# Altium PCB ControlsBoard.PcbDoc
Units mm, origin at the board's own origin, x right, y up, seen from the top; angles counter-clockwise.
Board outline 252.5 x 115 mm, 2 copper layers (Top Layer, Bottom Layer); 145 components, 65 nets, 227 pads, 0 vias.
Unrouted connection lines stored in the file: 84.
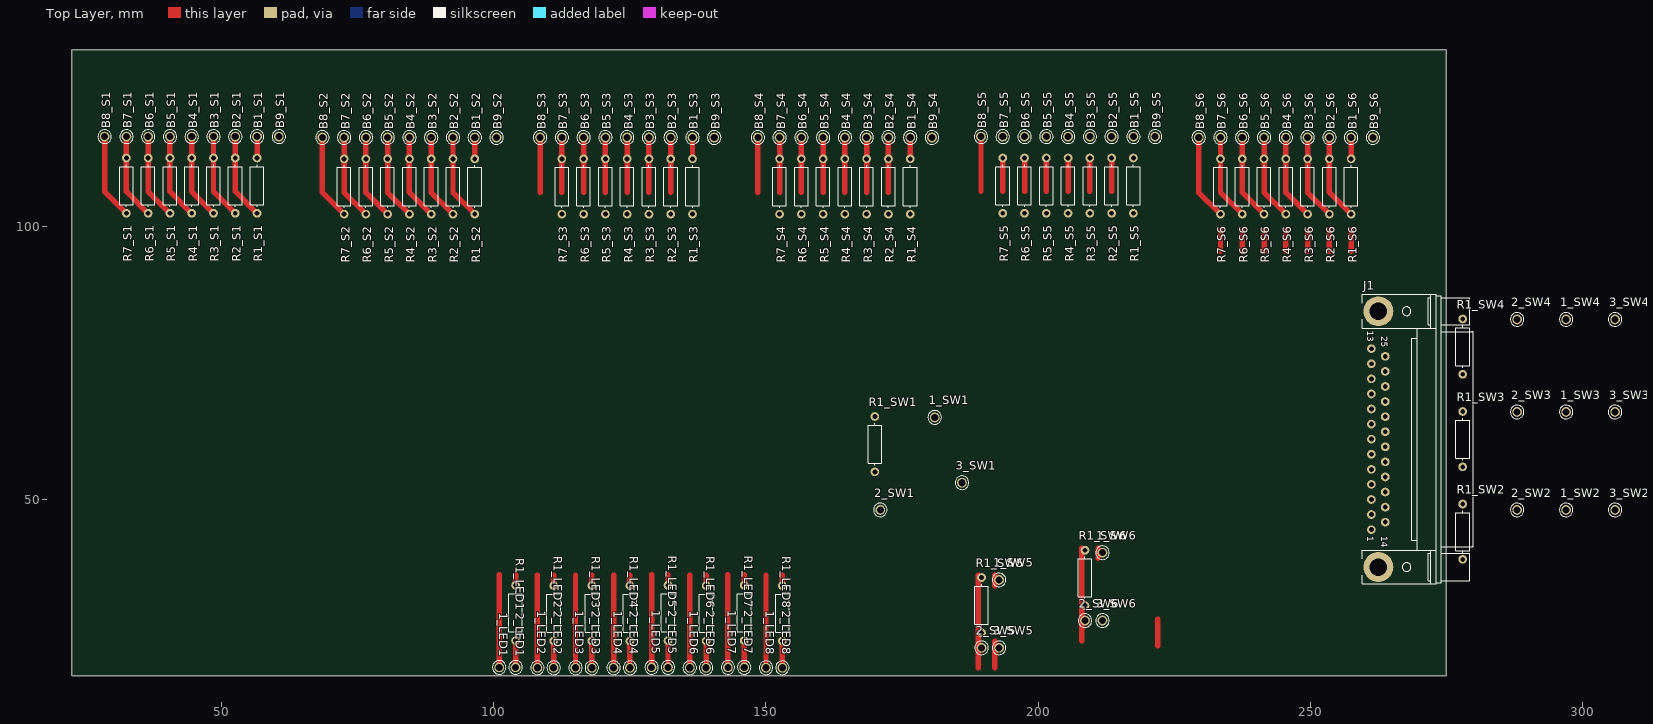
[diagram p0: Top Layer view]
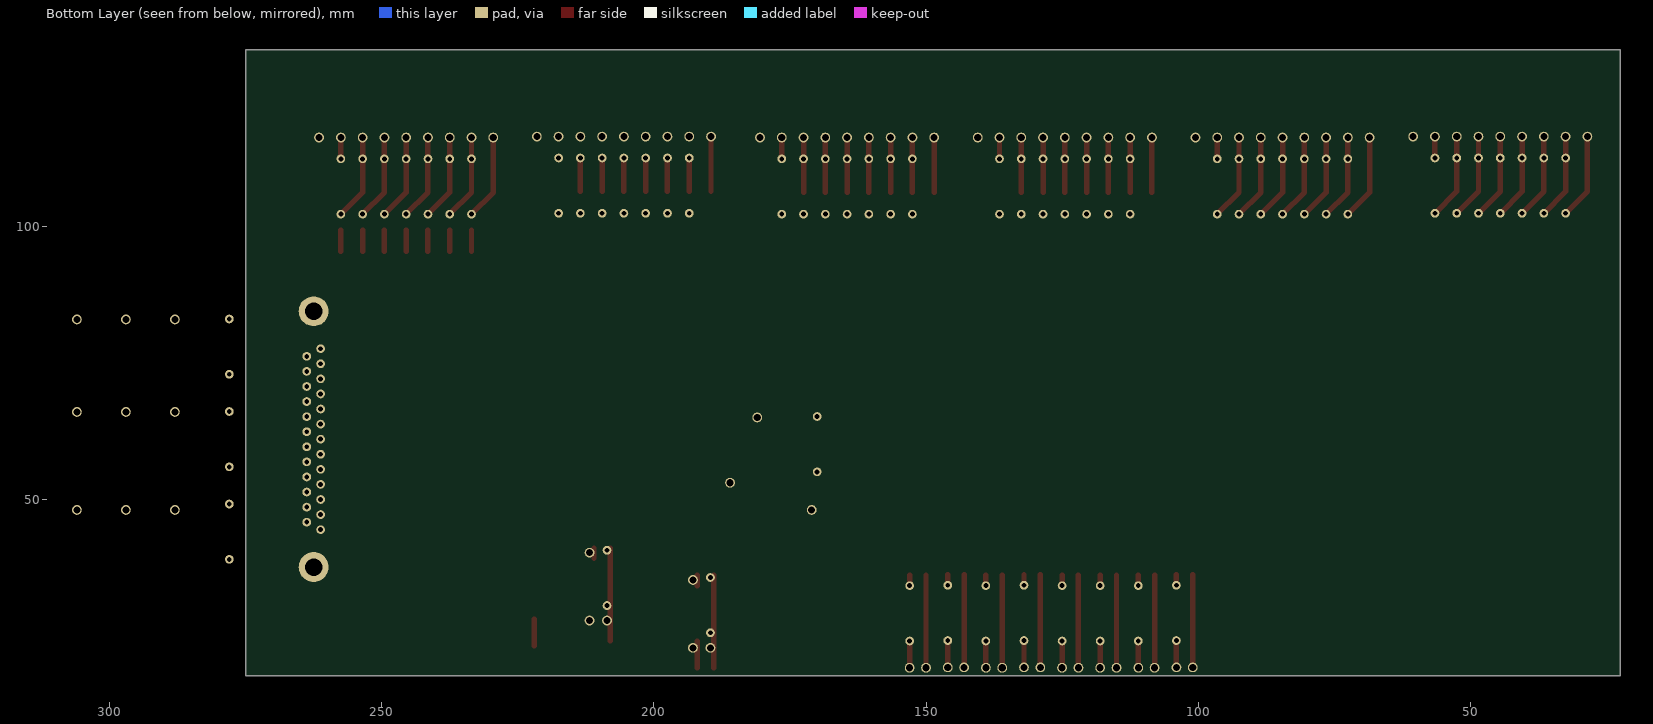
[diagram p1: Bottom Layer view, seen from below]

## Layer stack, top to bottom
Top Solder: solder mask 0.0102, Solder Resist, Dk 3.5
Top Layer: signal copper 0.0356
Dielectric 1: dielectric 0.32, FR-4, Dk 4.8
Bottom Layer: signal copper 0.0356
Bottom Solder: solder mask 0.0102, Solder Resist, Dk 3.5

## Board outline
22.5,130 22.5,132.5 275,132.5 275,17.5 22.5,17.5

## Design rules (kind name [scope] priority, off if disabled: settings)
Clearance [All] p1: gap=0.254
PolygonConnect [All] p1: connectstyle=Relief reliefconductorwidth=0.254 reliefentries=4 polygonreliefangle="90 Angle" airgapwidth=0.254
RoomDefinition SW4 [InComponentClass('SW4')] p1: confinementstyle=ConfineIn formatcopy=TRUE lockcomponents=FALSE outline 276,71 313,71 313,88 276,88
RoomDefinition SW3 [InComponentClass('SW3')] p2: confinementstyle=ConfineIn formatcopy=TRUE lockcomponents=FALSE outline 276,54 313,54 313,71 276,71
RoomDefinition SW2 [InComponentClass('SW2')] p3: confinementstyle=ConfineIn formatcopy=TRUE lockcomponents=FALSE outline 276,37 313,37 313,53 276,53
RoomDefinition LED1 [InComponentClass('LED1')] p4: confinementstyle=ConfineIn formatcopy=TRUE lockcomponents=FALSE outline 107,37.08 100,37.08 100,17.08 107,17.08
RoomDefinition LED2 [InComponentClass('LED2')] p5: confinementstyle=ConfineIn formatcopy=TRUE lockcomponents=FALSE outline 114,37 107,37 107,17 114,17
RoomDefinition LED3 [InComponentClass('LED3')] p6: confinementstyle=ConfineIn formatcopy=TRUE lockcomponents=FALSE outline 121,37 114,37 114,17 121,17
RoomDefinition LED4 [InComponentClass('LED4')] p7: confinementstyle=ConfineIn formatcopy=TRUE lockcomponents=FALSE outline 128,37 121,37 121,17 128,17
RoomDefinition LED5 [InComponentClass('LED5')] p8: confinementstyle=ConfineIn formatcopy=TRUE lockcomponents=FALSE outline 135,37.08 128,37.08 128,17.08 135,17.08
RoomDefinition LED6 [InComponentClass('LED6')] p9: confinementstyle=ConfineIn formatcopy=TRUE lockcomponents=FALSE outline 142,37 135,37 135,17 142,17
RoomDefinition SW6 [InComponentClass('SW6')] p10: confinementstyle=ConfineIn formatcopy=TRUE lockcomponents=FALSE outline 214,42 207,42 207,22 214,22
RoomDefinition SW5 [InComponentClass('SW5')] p11: confinementstyle=ConfineIn formatcopy=TRUE lockcomponents=FALSE outline 195,37 188,37 188,17 195,17
RoomDefinition SW1 [InComponentClass('SW1')] p12: confinementstyle=ConfineIn formatcopy=TRUE lockcomponents=FALSE outline 175.396,66.57 168.396,66.57 168.396,46.57 175.396,46.57
RoomDefinition LED8 [InComponentClass('LED8')] p13: confinementstyle=ConfineIn formatcopy=TRUE lockcomponents=FALSE outline 156,37 149,37 149,17 156,17
RoomDefinition LED7 [InComponentClass('LED7')] p14: confinementstyle=ConfineIn formatcopy=TRUE lockcomponents=FALSE outline 149,37.08 142,37.08 142,17.08 149,17.08
RoomDefinition S6 [InComponentClass('S6')] p15: confinementstyle=ConfineIn formatcopy=TRUE lockcomponents=FALSE outline 226.5,92.42 263.5,92.42 263.5,125.42 226.5,125.42
RoomDefinition S5 [InComponentClass('S5')] p16: confinementstyle=ConfineIn formatcopy=TRUE lockcomponents=FALSE outline 186.5,92.58 223.5,92.58 223.5,125.58 186.5,125.58
RoomDefinition S4 [InComponentClass('S4')] p17: confinementstyle=ConfineIn formatcopy=TRUE lockcomponents=FALSE outline 145.5,92.42 182.5,92.42 182.5,125.42 145.5,125.42
RoomDefinition S3 [InComponentClass('S3')] p18: confinementstyle=ConfineIn formatcopy=TRUE lockcomponents=FALSE outline 105.5,92.42 142.5,92.42 142.5,125.42 105.5,125.42
RoomDefinition S2 [InComponentClass('S2')] p19: confinementstyle=ConfineIn formatcopy=TRUE lockcomponents=FALSE outline 65.5,92.42 102.5,92.42 102.5,125.42 65.5,125.42
RoomDefinition S1 [InComponentClass('S1')] p20: confinementstyle=ConfineIn formatcopy=TRUE lockcomponents=FALSE outline 25.5,92.58 62.5,92.58 62.5,125.58 25.5,125.58
RoomDefinition ControlsBoard [InComponentClass('ControlsBoard')] p21: confinementstyle=ConfineIn formatcopy=TRUE lockcomponents=FALSE outline 280.5,88 258.5,88 258.5,31 280.5,31
RoutingVias [All] p1: holewidth=0.711 width=1.27 viastyle="Through Hole" minholewidth=0.711 minwidth=1.27 maxholewidth=0.711 maxwidth=1.27
SolderMaskExpansion [All] p1: expansion=0.102
Width [All] p1: maxlimit=2 minlimit=0.5 preferedwidth=1
29 further rules are at their usual default settings.

## Classes and differential pairs
channel class BypassUnit: SW1 SW2 SW3 SW4 SW5 SW6
component class S1: B1_S1 B2_S1 B3_S1 B4_S1 B5_S1 B6_S1 B7_S1 B8_S1 B9_S1 R1_S1 R2_S1 R3_S1 R4_S1 R5_S1 R6_S1 R7_S1
component class ControlsBoard: J1
net class SEL_BUS[1..6]: SEL_BUS1 SEL_BUS2 SEL_BUS3 SEL_BUS4 SEL_BUS5 SEL_BUS6
component class S2: B1_S2 B2_S2 B3_S2 B4_S2 B5_S2 B6_S2 B7_S2 B8_S2 B9_S2 R1_S2 R2_S2 R3_S2 R4_S2 R5_S2 R6_S2 R7_S2
component class S3: B1_S3 B2_S3 B3_S3 B4_S3 B5_S3 B6_S3 B7_S3 B8_S3 B9_S3 R1_S3 R2_S3 R3_S3 R4_S3 R5_S3 R6_S3 R7_S3
component class S4: B1_S4 B2_S4 B3_S4 B4_S4 B5_S4 B6_S4 B7_S4 B8_S4 B9_S4 R1_S4 R2_S4 R3_S4 R4_S4 R5_S4 R6_S4 R7_S4
component class S5: B1_S5 B2_S5 B3_S5 B4_S5 B5_S5 B6_S5 B7_S5 B8_S5 B9_S5 R1_S5 R2_S5 R3_S5 R4_S5 R5_S5 R6_S5 R7_S5
component class S6: B1_S6 B2_S6 B3_S6 B4_S6 B5_S6 B6_S6 B7_S6 B8_S6 B9_S6 R1_S6 R2_S6 R3_S6 R4_S6 R5_S6 R6_S6 R7_S6
channel class ResDivider: S1 S2 S3 S4 S5 S6
component class LED1: 1_LED1 2_LED1 R1_LED1
component class LED2: 1_LED2 2_LED2 R1_LED2
component class LED3: 1_LED3 2_LED3 R1_LED3
component class LED4: 1_LED4 2_LED4 R1_LED4
component class LED5: 1_LED5 2_LED5 R1_LED5
component class LED6: 1_LED6 2_LED6 R1_LED6
component class LED7: 1_LED7 1_LED13 2_LED7 2_LED13 R1_LED7 R1_LED13
component class LED8: 1_LED8 1_LED14 2_LED8 2_LED14 R1_LED8 R1_LED14
component class SW6: 1_SW6 2_SW6 3_SW6 R1_SW6
component class SW5: 1_SW5 2_SW5 3_SW5 R1_SW5
component class SW4: 1_SW4 2_SW4 3_SW4 R1_SW4
component class SW3: 1_SW3 2_SW3 3_SW3 R1_SW3
component class SW2: 1_SW2 2_SW2 3_SW2 R1_SW2
component class SW1: 1_SW1 2_SW1 3_SW1 R1_SW1
net class BP_BUS[1..8]: BP_BUS1 BP_BUS2 BP_BUS3 BP_BUS4 BP_BUS5 BP_BUS6 BP_BUS7 BP_BUS8
net class LED_BUS[1..8]: LED_BUS1 LED_BUS2 LED_BUS3 LED_BUS4 LED_BUS5 LED_BUS6 LED_BUS7 LED_BUS8
channel class LedUnit: LED1 LED2 LED3 LED4 LED5 LED6 LED7 LED8 SW9 SW10 SW11 SW12 SW13 SW14

## Components (designator, comment, footprint, x,y, rotation, side; value= is the part's Value field where it differs from the comment)
1_LED1 "Plated Hole" c180h130 101,19.08 r270 top (schematic designator 1)
1_LED2 "Plated Hole" c180h130 108,19 r270 top (schematic designator 1)
1_LED3 "Plated Hole" c180h130 115,19 r270 top (schematic designator 1)
1_LED4 "Plated Hole" c180h130 122,19 r270 top (schematic designator 1)
1_LED5 "Plated Hole" c180h130 129,19.08 r270 top (schematic designator 1)
1_LED6 "Plated Hole" c180h130 136,19 r270 top (schematic designator 1)
1_LED7 "Plated Hole" c180h130 143,19.08 r270 top (schematic designator 1)
1_LED8 "Plated Hole" c180h130 150,19 r270 top (schematic designator 1)
1_SW1 "Plated Hole" c180h130 181,65 r90 top (schematic designator 1)
1_SW2 "Plated Hole" c180h130 297,48 r90 top (schematic designator 1)
1_SW3 "Plated Hole" c180h130 297,66 r90 top (schematic designator 1)
1_SW4 "Plated Hole" c180h130 297,83 r90 top (schematic designator 1)
1_SW5 "Plated Hole" c180h130 192.812,35.142 r90 top (schematic designator 1)
1_SW6 "Plated Hole" c180h130 211.812,40.142 r90 top (schematic designator 1)
2_LED1 "Plated Hole" c180h130 104,19.08 r270 top (schematic designator 2)
2_LED2 "Plated Hole" c180h130 111,19 r270 top (schematic designator 2)
2_LED3 "Plated Hole" c180h130 118,19 r270 top (schematic designator 2)
2_LED4 "Plated Hole" c180h130 125,19 r270 top (schematic designator 2)
2_LED5 "Plated Hole" c180h130 132,19.08 r270 top (schematic designator 2)
2_LED6 "Plated Hole" c180h130 139,19 r270 top (schematic designator 2)
2_LED7 "Plated Hole" c180h130 146,19.08 r270 top (schematic designator 2)
2_LED8 "Plated Hole" c180h130 153,19 r270 top (schematic designator 2)
2_SW1 "Plated Hole" c180h130 171,48 r90 top (schematic designator 2)
2_SW2 "Plated Hole" c180h130 288,48 r90 top (schematic designator 2)
2_SW3 "Plated Hole" c180h130 288,66 r90 top (schematic designator 2)
2_SW4 "Plated Hole" c180h130 288,83 r90 top (schematic designator 2)
2_SW5 "Plated Hole" c180h130 189.604,22.671 r90 top (schematic designator 2)
2_SW6 "Plated Hole" c180h130 208.604,27.671 r90 top (schematic designator 2)
3_SW1 "Plated Hole" c180h130 186,53 r90 top (schematic designator 3)
3_SW2 "Plated Hole" c180h130 306,48 r90 top (schematic designator 3)
3_SW3 "Plated Hole" c180h130 306,66 r90 top (schematic designator 3)
3_SW4 "Plated Hole" c180h130 306,83 r90 top (schematic designator 3)
3_SW5 "Plated Hole" c180h130 192.812,22.671 r90 top (schematic designator 3)
3_SW6 "Plated Hole" c180h130 211.812,27.671 r90 top (schematic designator 3)
B1_S1 "Plated Hole" c180h130 56.5,116.58 r90 top (schematic designator B1)
B1_S2 "Plated Hole" c180h130 96.5,116.42 r90 top (schematic designator B1)
B1_S3 "Plated Hole" c180h130 136.5,116.42 r90 top (schematic designator B1)
B1_S4 "Plated Hole" c180h130 176.5,116.42 r90 top (schematic designator B1)
B1_S5 "Plated Hole" c180h130 217.5,116.58 r90 top (schematic designator B1)
B1_S6 "Plated Hole" c180h130 257.5,116.42 r90 top (schematic designator B1)
B2_S1 "Plated Hole" c180h130 52.5,116.58 r90 top (schematic designator B2)
B2_S2 "Plated Hole" c180h130 92.5,116.42 r90 top (schematic designator B2)
B2_S3 "Plated Hole" c180h130 132.5,116.42 r90 top (schematic designator B2)
B2_S4 "Plated Hole" c180h130 172.5,116.42 r90 top (schematic designator B2)
B2_S5 "Plated Hole" c180h130 213.5,116.58 r90 top (schematic designator B2)
B2_S6 "Plated Hole" c180h130 253.5,116.42 r90 top (schematic designator B2)
B3_S1 "Plated Hole" c180h130 48.5,116.58 r90 top (schematic designator B3)
B3_S2 "Plated Hole" c180h130 88.5,116.42 r90 top (schematic designator B3)
B3_S3 "Plated Hole" c180h130 128.5,116.42 r90 top (schematic designator B3)
B3_S4 "Plated Hole" c180h130 168.5,116.42 r90 top (schematic designator B3)
B3_S5 "Plated Hole" c180h130 209.5,116.58 r90 top (schematic designator B3)
B3_S6 "Plated Hole" c180h130 249.5,116.42 r90 top (schematic designator B3)
B4_S1 "Plated Hole" c180h130 44.5,116.58 r90 top (schematic designator B4)
B4_S2 "Plated Hole" c180h130 84.5,116.42 r90 top (schematic designator B4)
B4_S3 "Plated Hole" c180h130 124.5,116.42 r90 top (schematic designator B4)
B4_S4 "Plated Hole" c180h130 164.5,116.42 r90 top (schematic designator B4)
B4_S5 "Plated Hole" c180h130 205.5,116.58 r90 top (schematic designator B4)
B4_S6 "Plated Hole" c180h130 245.5,116.42 r90 top (schematic designator B4)
B5_S1 "Plated Hole" c180h130 40.5,116.58 r90 top (schematic designator B5)
B5_S2 "Plated Hole" c180h130 80.5,116.42 r90 top (schematic designator B5)
B5_S3 "Plated Hole" c180h130 120.5,116.42 r90 top (schematic designator B5)
B5_S4 "Plated Hole" c180h130 160.5,116.42 r90 top (schematic designator B5)
B5_S5 "Plated Hole" c180h130 201.5,116.58 r90 top (schematic designator B5)
B5_S6 "Plated Hole" c180h130 241.5,116.42 r90 top (schematic designator B5)
B6_S1 "Plated Hole" c180h130 36.5,116.58 r90 top (schematic designator B6)
B6_S2 "Plated Hole" c180h130 76.5,116.42 r90 top (schematic designator B6)
B6_S3 "Plated Hole" c180h130 116.5,116.42 r90 top (schematic designator B6)
B6_S4 "Plated Hole" c180h130 156.5,116.42 r90 top (schematic designator B6)
B6_S5 "Plated Hole" c180h130 197.5,116.58 r90 top (schematic designator B6)
B6_S6 "Plated Hole" c180h130 237.5,116.42 r90 top (schematic designator B6)
B7_S1 "Plated Hole" c180h130 32.5,116.58 r90 top (schematic designator B7)
B7_S2 "Plated Hole" c180h130 72.5,116.42 r90 top (schematic designator B7)
B7_S3 "Plated Hole" c180h130 112.5,116.42 r90 top (schematic designator B7)
B7_S4 "Plated Hole" c180h130 152.5,116.42 r90 top (schematic designator B7)
B7_S5 "Plated Hole" c180h130 193.5,116.58 r90 top (schematic designator B7)
B7_S6 "Plated Hole" c180h130 233.5,116.42 r90 top (schematic designator B7)
B8_S1 "Plated Hole" c180h130 28.5,116.58 r90 top (schematic designator B8)
B8_S2 "Plated Hole" c180h130 68.5,116.42 r90 top (schematic designator B8)
B8_S3 "Plated Hole" c180h130 108.5,116.42 r90 top (schematic designator B8)
B8_S4 "Plated Hole" c180h130 148.5,116.42 r90 top (schematic designator B8)
B8_S5 "Plated Hole" c180h130 189.5,116.58 r90 top (schematic designator B8)
B8_S6 "Plated Hole" c180h130 229.5,116.42 r90 top (schematic designator B8)
B9_S1 "Plated Hole" c180h130 60.5,116.58 r90 top (schematic designator B9)
B9_S2 "Plated Hole" c180h130 100.5,116.42 r90 top (schematic designator B9)
B9_S3 "Plated Hole" c180h130 140.5,116.42 r90 top (schematic designator B9)
B9_S4 "Plated Hole" c180h130 180.5,116.42 r90 top (schematic designator B9)
B9_S5 "Plated Hole" c180h130 221.5,116.58 r90 top (schematic designator B9)
B9_S6 "Plated Hole" c180h130 261.5,116.42 r90 top (schematic designator B9)
J1 "D-Sub" AMPHENOL_L717DFB25P1ATN 262.5,61 r270 top
R1_LED1 "510" RES_ARCOL_RCC025 104,29.08 r270 top (schematic designator R1)
R1_LED2 "510" RES_ARCOL_RCC025 111,29 r270 top (schematic designator R1)
R1_LED3 "510" RES_ARCOL_RCC025 118,29 r270 top (schematic designator R1)
R1_LED4 "510" RES_ARCOL_RCC025 125,29 r270 top (schematic designator R1)
R1_LED5 "510" RES_ARCOL_RCC025 132,29.08 r270 top (schematic designator R1)
R1_LED6 "510" RES_ARCOL_RCC025 139,29 r270 top (schematic designator R1)
R1_LED7 "510" RES_ARCOL_RCC025 146,29.08 r270 top (schematic designator R1)
R1_LED8 "510" RES_ARCOL_RCC025 153,29 r270 top (schematic designator R1)
R1_S1 "10K" RES_ARCOL_RCC025 56.5,107.58 r90 top (schematic designator R1)
R1_S2 "10K" RES_ARCOL_RCC025 96.5,107.42 r90 top (schematic designator R1)
R1_S3 "10K" RES_ARCOL_RCC025 136.5,107.42 r90 top (schematic designator R1)
R1_S4 "10K" RES_ARCOL_RCC025 176.5,107.42 r90 top (schematic designator R1)
R1_S5 "10K" RES_ARCOL_RCC025 217.5,107.58 r90 top (schematic designator R1)
R1_S6 "10K" RES_ARCOL_RCC025 257.5,107.42 r90 top (schematic designator R1)
R1_SW1 "510" RES_ARCOL_RCC025 170,60.08 r90 top (schematic designator R1)
R1_SW2 "510" RES_ARCOL_RCC025 278,44 r90 top (schematic designator R1)
R1_SW3 "510" RES_ARCOL_RCC025 278,61 r90 top (schematic designator R1)
R1_SW4 "510" RES_ARCOL_RCC025 278,78 r90 top (schematic designator R1)
R1_SW5 "510" RES_ARCOL_RCC025 189.604,30.51 r90 top (schematic designator R1)
R1_SW6 "510" RES_ARCOL_RCC025 208.604,35.51 r90 top (schematic designator R1)
R2_S1 "10K" RES_ARCOL_RCC025 52.5,107.58 r90 top (schematic designator R2)
R2_S2 "10K" RES_ARCOL_RCC025 92.5,107.42 r90 top (schematic designator R2)
R2_S3 "10K" RES_ARCOL_RCC025 132.5,107.42 r90 top (schematic designator R2)
R2_S4 "10K" RES_ARCOL_RCC025 172.5,107.42 r90 top (schematic designator R2)
R2_S5 "10K" RES_ARCOL_RCC025 213.5,107.58 r90 top (schematic designator R2)
R2_S6 "10K" RES_ARCOL_RCC025 253.5,107.42 r90 top (schematic designator R2)
R3_S1 "10K" RES_ARCOL_RCC025 48.5,107.58 r90 top (schematic designator R3)
R3_S2 "10K" RES_ARCOL_RCC025 88.5,107.42 r90 top (schematic designator R3)
R3_S3 "10K" RES_ARCOL_RCC025 128.5,107.42 r90 top (schematic designator R3)
R3_S4 "10K" RES_ARCOL_RCC025 168.5,107.42 r90 top (schematic designator R3)
R3_S5 "10K" RES_ARCOL_RCC025 209.5,107.58 r90 top (schematic designator R3)
R3_S6 "10K" RES_ARCOL_RCC025 249.5,107.42 r90 top (schematic designator R3)
R4_S1 "10K" RES_ARCOL_RCC025 44.5,107.58 r90 top (schematic designator R4)
R4_S2 "10K" RES_ARCOL_RCC025 84.5,107.42 r90 top (schematic designator R4)
R4_S3 "10K" RES_ARCOL_RCC025 124.5,107.42 r90 top (schematic designator R4)
R4_S4 "10K" RES_ARCOL_RCC025 164.5,107.42 r90 top (schematic designator R4)
R4_S5 "10K" RES_ARCOL_RCC025 205.5,107.58 r90 top (schematic designator R4)
R4_S6 "10K" RES_ARCOL_RCC025 245.5,107.42 r90 top (schematic designator R4)
R5_S1 "10K" RES_ARCOL_RCC025 40.5,107.58 r90 top (schematic designator R5)
R5_S2 "10K" RES_ARCOL_RCC025 80.5,107.42 r90 top (schematic designator R5)
R5_S3 "10K" RES_ARCOL_RCC025 120.5,107.42 r90 top (schematic designator R5)
R5_S4 "10K" RES_ARCOL_RCC025 160.5,107.42 r90 top (schematic designator R5)
R5_S5 "10K" RES_ARCOL_RCC025 201.5,107.58 r90 top (schematic designator R5)
R5_S6 "10K" RES_ARCOL_RCC025 241.5,107.42 r90 top (schematic designator R5)
R6_S1 "10K" RES_ARCOL_RCC025 36.5,107.58 r90 top (schematic designator R6)
R6_S2 "10K" RES_ARCOL_RCC025 76.5,107.42 r90 top (schematic designator R6)
R6_S3 "10K" RES_ARCOL_RCC025 116.5,107.42 r90 top (schematic designator R6)
R6_S4 "10K" RES_ARCOL_RCC025 156.5,107.42 r90 top (schematic designator R6)
R6_S5 "10K" RES_ARCOL_RCC025 197.5,107.58 r90 top (schematic designator R6)
R6_S6 "10K" RES_ARCOL_RCC025 237.5,107.42 r90 top (schematic designator R6)
R7_S1 "10K" RES_ARCOL_RCC025 32.5,107.58 r90 top (schematic designator R7)
R7_S2 "10K" RES_ARCOL_RCC025 72.5,107.42 r90 top (schematic designator R7)
R7_S3 "10K" RES_ARCOL_RCC025 112.5,107.42 r90 top (schematic designator R7)
R7_S4 "10K" RES_ARCOL_RCC025 152.5,107.42 r90 top (schematic designator R7)
R7_S5 "10K" RES_ARCOL_RCC025 193.5,107.58 r90 top (schematic designator R7)
R7_S6 "10K" RES_ARCOL_RCC025 233.5,107.42 r90 top (schematic designator R7)

## Footprints (in the part's own frame and the unit in brackets; to place one, negate y for a bottom-side part, rotate by r counter-clockwise, add the part's x,y. Pads: shape width x height; smd on the part's side, far side on the other; paste and mask are expansions set on the pad)
AMPHENOL_L717DFB25P1ATN [mm] "Right Angled D-Sub 25 Male Contacts with Metal Bracket and Front Female Screwlock (UNC4-40)"
  round 1.6 hole 0.9: 1(16.62,-1.27) 2(13.85,-1.27) 3(11.08,-1.27) 4(8.31,-1.27) 5(5.54,-1.27) 6(2.77,-1.27) 7(0,-1.27) 8(-2.77,-1.27) 9(-5.54,-1.27) 10(-8.31,-1.27) 11(-11.08,-1.27) 12(-13.85,-1.27) 13(-16.62,-1.27) 14(15.25,1.27) 15(12.48,1.27) 16(9.71,1.27) 17(6.94,1.27) 18(4.17,1.27) 19(1.4,1.27) 20(-1.37,1.27) 21(-4.14,1.27) 22(-6.91,1.27) 23(-9.68,1.27) 24(-12.45,1.27) 25(-15.22,1.27)
  round 5.5 hole 3.2: 26(-23.5,0) 27(23.5,0)
  silkscreen extent -26.6,-2.93 26.6,17.47, body extent -26.6,-2.93 26.6,17.47, height 13.45
c180h130 [mm] "Plated Through Hole: Hole Dia.=1.3mm Pad Dia.=1.8mm"
  round 1.8 hole 1.3: 1(0,0)
  silkscreen extent -1.25,-1.25 1.25,1.25
RES_ARCOL_RCC025 [mm] "Resistor, Axial, Pad spacing 10.16 mm - Body Lengh 6.3m X Body Diameter 2.4mm"
  round 1.6 hole 0.9: 1(-5.08,0) 2(5.08,0)
  silkscreen extent -3.88,-1.25 3.88,1.25, body extent -5.38,-1.25 5.38,1.25, height 2.5

## Part data
1_LED1 1_LED2 1_LED3 1_LED4 1_LED5 1_LED6 1_LED7 1_LED8 1_SW1 1_SW2 1_SW3 1_SW4 1_SW5 1_SW6 2_LED1 2_LED2 2_LED3 2_LED4 2_LED5 2_LED6 2_LED7 2_LED8 2_SW1 2_SW2 2_SW3 2_SW4 2_SW5 2_SW6 3_SW1 3_SW2 3_SW3 3_SW4 3_SW5 3_SW6 B1_S1 B1_S2 B1_S3 B1_S4 B1_S5 B1_S6 B2_S1 B2_S2 B2_S3 B2_S4 B2_S5 B2_S6 B3_S1 B3_S2 B3_S3 B3_S4 B3_S5 B3_S6 B4_S1 B4_S2 B4_S3 B4_S4 B4_S5 B4_S6 B5_S1 B5_S2 B5_S3 B5_S4 B5_S5 B5_S6 B6_S1 B6_S2 B6_S3 B6_S4 B6_S5 B6_S6 B7_S1 B7_S2 B7_S3 B7_S4 B7_S5 B7_S6 B8_S1 B8_S2 B8_S3 B8_S4 B8_S5 B8_S6 B9_S1 B9_S2 B9_S3 B9_S4 B9_S5 B9_S6: library part PLATED_HOLE1.3_PAD1.8, "Single Terminal Socket"
J1: library part AMPHENOL_L717DFB25P1ATN, "Connector D-sub 25 Male"
R1_LED1 R1_LED2 R1_LED3 R1_LED4 R1_LED5 R1_LED6 R1_LED7 R1_LED8 R1_S1 R1_S2 R1_S3 R1_S4 R1_S5 R1_S6 R1_SW1 R1_SW2 R1_SW3 R1_SW4 R1_SW5 R1_SW6 R2_S1 R2_S2 R2_S3 R2_S4 R2_S5 R2_S6 R3_S1 R3_S2 R3_S3 R3_S4 R3_S5 R3_S6 R4_S1 R4_S2 R4_S3 R4_S4 R4_S5 R4_S6 R5_S1 R5_S2 R5_S3 R5_S4 R5_S5 R5_S6 R6_S1 R6_S2 R6_S3 R6_S4 R6_S5 R6_S6 R7_S1 R7_S2 R7_S3 R7_S4 R7_S5 R7_S6: library part RCF_5K1_5%_0.25W_+10-6PPM_ARCOL_RCC025, "Resistor - 5%"

## Nets (pads, with @x,y where several pads share a name; then routed paths per layer and width w, separated by ;. In a path a pad name is that pad's centre, name@x,y a point inside that pad or via, vN(x,y) a via of type N, cw(c..) or ccw(c..) an arc to the next point about the centre after c; other vN are vias at no path point)
BP_BUS1: 1_SW1.1 | length 17
  Top Layer w1: 208,24 208,41
BP_BUS2: 1_SW2.1 | length 17
  Top Layer w1: 189,19 189,36
BP_BUS3: 1_SW3.1
BP_BUS4: 1_SW4.1
BP_BUS5: 1_SW5.1
BP_BUS6: 1_SW6.1
GND: B8_S1.1 B8_S2.1 B8_S3.1 B8_S4.1 B8_S5.1 B8_S6.1 R1_LED1.1 R1_LED2.1 R1_LED3.1 R1_LED4.1 R1_LED5.1 R1_LED6.1 R1_LED7.1 R1_LED8.1 R1_SW1.1 R1_SW2.1 R1_SW3.1 R1_SW4.1 R1_SW5.1 R1_SW6.1 R7_S1.1 R7_S2.1 R7_S3.1 R7_S4.1 R7_S5.1 R7_S6.1 | length 96.7
  Top Layer w1: B8_S1.1 28.5,106.5 R7_S1.1 ; B8_S2.1 68.5,106.34 R7_S2.1 ; R1_LED1.1 104,36.08 ; 108.5,106.34 B8_S3.1 ; R1_LED2.1 111,36 ; R1_LED3.1 118,36 ; R1_LED4.1 125,36 ; R1_LED5.1 132,36.08 ; R1_LED6.1 139,36 ; R1_LED7.1 146,36.08 ; 148.5,106.34 B8_S4.1 ; R1_LED8.1 153,36 ; 189.5,106.5 B8_S5.1 ; 192,34.08 192,36 ; 211,39.08 211,41 ; B8_S6.1 229.5,106.34 R7_S6.1
LED_BUS: 1_LED1.1 1_LED2.1 1_LED3.1 1_LED4.1 1_LED5.1 1_LED6.1 1_LED7.1 1_LED8.1 | length 136
  Top Layer w1: 1_LED1.1 101,36.08 ; 1_LED2.1 108,36 ; 1_LED3.1 115,36 ; 1_LED4.1 122,36 ; 1_LED5.1 129,36.08 ; 1_LED6.1 136,36 ; 1_LED7.1 143,36.08 ; 1_LED8.1 150,36
Net2_LED1_1: 2_LED1.1 R1_LED1.2 | length 4.9
  Top Layer w1: 2_LED1.1 R1_LED1.2
Net2_LED2_1: 2_LED2.1 R1_LED2.2 | length 4.9
  Top Layer w1: 2_LED2.1 R1_LED2.2
Net2_LED3_1: 2_LED3.1 R1_LED3.2 | length 4.9
  Top Layer w1: 2_LED3.1 R1_LED3.2
Net2_LED4_1: 2_LED4.1 R1_LED4.2 | length 4.9
  Top Layer w1: 2_LED4.1 R1_LED4.2
Net2_LED5_1: 2_LED5.1 R1_LED5.2 | length 4.9
  Top Layer w1: 2_LED5.1 R1_LED5.2
Net2_LED6_1: 2_LED6.1 R1_LED6.2 | length 4.9
  Top Layer w1: 2_LED6.1 R1_LED6.2
Net2_LED7_1: 2_LED7.1 R1_LED7.2 | length 4.9
  Top Layer w1: 2_LED7.1 R1_LED7.2
Net2_LED8_1: 2_LED8.1 R1_LED8.2 | length 4.9
  Top Layer w1: 2_LED8.1 R1_LED8.2
Net2_SW1_1: 2_SW1.1 R1_SW1.2 | length 4.9
  Top Layer w1: 222,23 222,27.92
Net2_SW2_1: 2_SW2.1 R1_SW2.2 | length 4.9
  Top Layer w1: 192,19 192,23.92
Net2_SW3_1: 2_SW3.1 R1_SW3.2
Net2_SW4_1: 2_SW4.1 R1_SW4.2
Net2_SW5_1: 2_SW5.1 R1_SW5.2
Net2_SW6_1: 2_SW6.1 R1_SW6.2
NetB2_S1_1: B2_S1.1 R1_S1.1 R2_S1.2 | length 15.7
  Top Layer w1: B2_S1.1 R2_S1.2 52.5,106.5 R1_S1.1
NetB2_S2_1: B2_S2.1 R1_S2.1 R2_S2.2 | length 15.7
  Top Layer w1: B2_S2.1 R2_S2.2 92.5,106.34 R1_S2.1
NetB2_S3_1: B2_S3.1 R1_S3.1 R2_S3.2 | length 10.1
  Top Layer w1: 132.5,106.34 R2_S3.2 B2_S3.1
NetB2_S4_1: B2_S4.1 R1_S4.1 R2_S4.2 | length 10.1
  Top Layer w1: 172.5,106.34 R2_S4.2 B2_S4.1
NetB2_S5_1: B2_S5.1 R1_S5.1 R2_S5.2 | length 10.1
  Top Layer w1: 213.5,106.5 R2_S5.2 ; 253.5,95.5 253.5,99.42
NetB2_S6_1: B2_S6.1 R1_S6.1 R2_S6.2 | length 15.7
  Top Layer w1: B2_S6.1 R2_S6.2 253.5,106.34 R1_S6.1
NetB3_S1_1: B3_S1.1 R2_S1.1 R3_S1.2 | length 15.7
  Top Layer w1: B3_S1.1 R3_S1.2 48.5,106.5 R2_S1.1
NetB3_S2_1: B3_S2.1 R2_S2.1 R3_S2.2 | length 15.7
  Top Layer w1: B3_S2.1 R3_S2.2 88.5,106.34 R2_S2.1
NetB3_S3_1: B3_S3.1 R2_S3.1 R3_S3.2 | length 10.1
  Top Layer w1: 128.5,106.34 R3_S3.2 B3_S3.1
NetB3_S4_1: B3_S4.1 R2_S4.1 R3_S4.2 | length 10.1
  Top Layer w1: 168.5,106.34 R3_S4.2 B3_S4.1
NetB3_S5_1: B3_S5.1 R2_S5.1 R3_S5.2 | length 10.1
  Top Layer w1: 209.5,106.5 R3_S5.2 ; 249.5,95.5 249.5,99.42
NetB3_S6_1: B3_S6.1 R2_S6.1 R3_S6.2 | length 15.7
  Top Layer w1: B3_S6.1 R3_S6.2 249.5,106.34 R2_S6.1
NetB4_S1_1: B4_S1.1 R3_S1.1 R4_S1.2 | length 15.7
  Top Layer w1: B4_S1.1 R4_S1.2 44.5,106.5 R3_S1.1
NetB4_S2_1: B4_S2.1 R3_S2.1 R4_S2.2 | length 15.7
  Top Layer w1: B4_S2.1 R4_S2.2 84.5,106.34 R3_S2.1
NetB4_S3_1: B4_S3.1 R3_S3.1 R4_S3.2 | length 10.1
  Top Layer w1: 124.5,106.34 R4_S3.2 B4_S3.1
NetB4_S4_1: B4_S4.1 R3_S4.1 R4_S4.2 | length 10.1
  Top Layer w1: 164.5,106.34 R4_S4.2 B4_S4.1
NetB4_S5_1: B4_S5.1 R3_S5.1 R4_S5.2 | length 10.1
  Top Layer w1: 205.5,106.5 R4_S5.2 ; 245.5,95.5 245.5,99.42
NetB4_S6_1: B4_S6.1 R3_S6.1 R4_S6.2 | length 15.7
  Top Layer w1: B4_S6.1 R4_S6.2 245.5,106.34 R3_S6.1
NetB5_S1_1: B5_S1.1 R4_S1.1 R5_S1.2 | length 15.7
  Top Layer w1: B5_S1.1 R5_S1.2 40.5,106.5 R4_S1.1
NetB5_S2_1: B5_S2.1 R4_S2.1 R5_S2.2 | length 15.7
  Top Layer w1: B5_S2.1 R5_S2.2 80.5,106.34 R4_S2.1
NetB5_S3_1: B5_S3.1 R4_S3.1 R5_S3.2 | length 10.1
  Top Layer w1: 120.5,106.34 R5_S3.2 B5_S3.1
NetB5_S4_1: B5_S4.1 R4_S4.1 R5_S4.2 | length 10.1
  Top Layer w1: 160.5,106.34 R5_S4.2 B5_S4.1
NetB5_S5_1: B5_S5.1 R4_S5.1 R5_S5.2 | length 10.1
  Top Layer w1: 201.5,106.5 R5_S5.2 ; 241.5,95.5 241.5,99.42
NetB5_S6_1: B5_S6.1 R4_S6.1 R5_S6.2 | length 15.7
  Top Layer w1: B5_S6.1 R5_S6.2 241.5,106.34 R4_S6.1
NetB6_S1_1: B6_S1.1 R5_S1.1 R6_S1.2 | length 15.7
  Top Layer w1: B6_S1.1 R6_S1.2 36.5,106.5 R5_S1.1
NetB6_S2_1: B6_S2.1 R5_S2.1 R6_S2.2 | length 15.7
  Top Layer w1: B6_S2.1 R6_S2.2 76.5,106.34 R5_S2.1
NetB6_S3_1: B6_S3.1 R5_S3.1 R6_S3.2 | length 10.1
  Top Layer w1: 116.5,106.34 R6_S3.2 B6_S3.1
NetB6_S4_1: B6_S4.1 R5_S4.1 R6_S4.2 | length 10.1
  Top Layer w1: 156.5,106.34 R6_S4.2 B6_S4.1
NetB6_S5_1: B6_S5.1 R5_S5.1 R6_S5.2 | length 10.1
  Top Layer w1: 197.5,106.5 R6_S5.2 ; 237.5,95.5 237.5,99.42
NetB6_S6_1: B6_S6.1 R5_S6.1 R6_S6.2 | length 15.7
  Top Layer w1: B6_S6.1 R6_S6.2 237.5,106.34 R5_S6.1
NetB7_S1_1: B7_S1.1 R6_S1.1 R7_S1.2 | length 15.7
  Top Layer w1: B7_S1.1 R7_S1.2 32.5,106.5 R6_S1.1
NetB7_S2_1: B7_S2.1 R6_S2.1 R7_S2.2 | length 15.7
  Top Layer w1: B7_S2.1 R7_S2.2 72.5,106.34 R6_S2.1
NetB7_S3_1: B7_S3.1 R6_S3.1 R7_S3.2 | length 10.1
  Top Layer w1: 112.5,106.34 R7_S3.2 B7_S3.1
NetB7_S4_1: B7_S4.1 R6_S4.1 R7_S4.2 | length 10.1
  Top Layer w1: 152.5,106.34 R7_S4.2 B7_S4.1
NetB7_S5_1: B7_S5.1 R6_S5.1 R7_S5.2 | length 10.1
  Top Layer w1: 193.5,106.5 R7_S5.2 ; 233.5,95.5 233.5,99.42
NetB7_S6_1: B7_S6.1 R6_S6.1 R7_S6.2 | length 15.7
  Top Layer w1: B7_S6.1 R7_S6.2 233.5,106.34 R6_S6.1
SEL_BUS1: B9_S1.1
SEL_BUS2: B9_S2.1
SEL_BUS3: B9_S3.1
SEL_BUS4: B9_S4.1
SEL_BUS5: B9_S5.1
SEL_BUS6: B9_S6.1
VCC: 3_SW1.1 3_SW2.1 3_SW3.1 3_SW4.1 3_SW5.1 3_SW6.1 B1_S1.1 B1_S2.1 B1_S3.1 B1_S4.1 B1_S5.1 B1_S6.1 R1_S1.2 R1_S2.2 R1_S3.2 R1_S4.2 R1_S5.2 R1_S6.2 | length 23.5
  Top Layer w1: R1_S1.2 B1_S1.1 ; R1_S2.2 B1_S2.1 ; R1_S3.2 B1_S3.1 ; R1_S4.2 B1_S4.1 ; 257.5,95.5 257.5,99.42 ; R1_S6.2 B1_S6.1
pads on no net: J1.1 J1.2 J1.3 J1.4 J1.5 J1.6 J1.7 J1.8 J1.9 J1.10 J1.11 J1.12 J1.13 J1.14 J1.15 J1.16 J1.17 J1.18 J1.19 J1.20 J1.21 J1.22 J1.23 J1.24 J1.25 J1.26 J1.27

## Silkscreen, mask and mechanical layers (free items; w line width, h text height)
Mechanical 1:
  the board outline again, w0.254

## Text inside footprints (layer, text, board x,y; h text height)
J1: Top Overlay "25" at 263.008,79.887 h1.2 r270; Top Overlay "13" at 260.5,80.9 h1.2 r270; Top Overlay "14" at 263.008,43.129 h1.2 r270; Top Overlay "1" at 260.468,43.129 h1.2 r270